# EAGLE board IR_BLASTER_MINI (EAGLE 9.6.2)
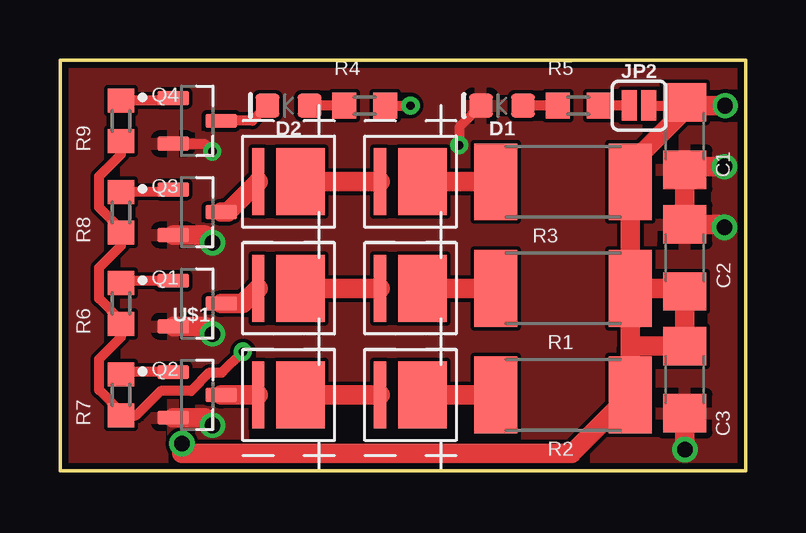
[diagram p0: board, top side]
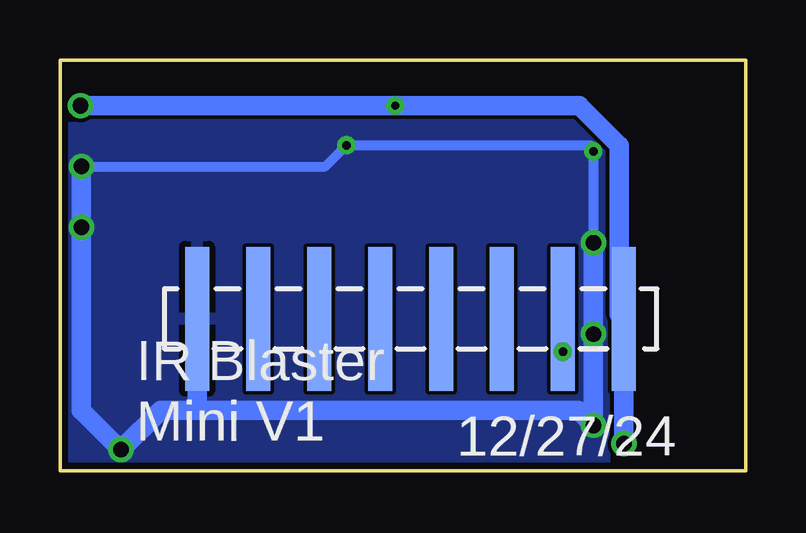
[diagram p1: board, bottom side, seen from below]

Size 28.57 x 17.14 mm. Coordinates in mm from the lower left corner, seen from the top.
Outline: 0,17.14 0,0 28.57,0 28.57,17.14 0,17.14
Copper layers (1*16): Top 0.035mm / dielectric 1.5mm / Bottom 0.035mm
Design rules "default *": minimum track width 6mil, minimum drill 0.35mm, track to track 6mil, track to pad 6mil, pad to pad 6mil, via to via 6mil, smd to smd 6mil, copper to edge 10mil, drill to drill 6mil, minimum pad ring 10mil, minimum via ring 8mil, stop-mask expansion 4mil, vias tented up to drill 0mil, thermal gap 10mil

## Footprints (pad centres in the part's own frame; a part is rotated, then mirrored left to right if it is on the bottom)
C3216 = smd 1.6 x 1.8: 1 -1.4,0; 2 1.4,0
LED-0603 = smd 1 x 1: A -0.877,0; C 0.877,0
SMT-JUMPER_2_NC_PASTE_SILK = smd 0.635 x 1.27: 1 -0.406,0; 2 0.406,0
SOT95P240X120-3N = smd 1.32 x 0.6: 1 -1,0.95; 2 -1,-0.95; 3 1,0
R2512 = smd 1.8 x 3.2: 1 -2.8,0; 2 2.8,0
R0603 = smd 1 x 1.1: 1 -0.85,0; 2 0.85,0
LEFT-H1-SMD = smd 1 x 6 bottom: 1 0,-0.001; 2 2.54,-0.001; 3 5.08,-0.001; 4 7.62,0.001; 5 10.16,-0.001; 6 12.7,0.001; 7 15.24,-0.001; 8 17.78,0.001
XSSYSE03-EMC3838A-H90 = smd 2.032 x 2.794: P$1 -0.496,0 | smd 0.508 x 2.794: P$2 1.27,0

## Placement (x,y rotation side)
C1  22uF  [C3216]  26.04,13.97 270 top
C2  22uF  [C3216]  26.04,8.89 90 top
C3  22uF  [C3216]  26.04,3.81 270 top
D1  Orange  [LED-0603]  18.41,15.24 180 top
D2  Blue  [LED-0603]  9.53,15.24 180 top
JP2  JUMPER-SMT_2_NC_PASTE_SILK  [SMT-JUMPER_2_NC_PASTE_SILK]  24.13,15.24 0 top
Q1  MMBT2222A  [SOT95P240X120-3N]  5.71,6.99 0 top
Q2  MMBT2222A  [SOT95P240X120-3N]  5.71,3.17 0 top
Q3  MMBT2222A  [SOT95P240X120-3N]  5.71,10.79 0 top
Q4  MMBT2222A  [SOT95P240X120-3N]  5.71,14.61 0 top
R1  5R1  [R2512]  20.95,7.62 0 top
R2  5R1  [R2512]  20.95,3.17 0 top
R3  5R1  [R2512]  20.95,12.06 0 top
R4  2K2  [R0603]  12.7,15.24 0 top
R5  2K2  [R0603]  21.59,15.24 0 top
R6  1K  [R0603]  2.54,6.99 90 top
R7  1K  [R0603]  2.54,3.17 90 top
R8  1K  [R0603]  2.54,10.79 90 top
R9  1K  [R0603]  2.54,14.61 90 top
U$1  LEFT-H1-SMD  [LEFT-H1-SMD]  5.08,6.35 0 top
U$2  XSSYSE03-EMC3838A-H90  [XSSYSE03-EMC3838A-H90]  9.53,7.62 180 top
U$3  XSSYSE03-EMC3838A-H90  [XSSYSE03-EMC3838A-H90]  14.61,7.62 180 top
U$4  XSSYSE03-EMC3838A-H90  [XSSYSE03-EMC3838A-H90]  14.61,3.17 180 top
U$5  XSSYSE03-EMC3838A-H90  [XSSYSE03-EMC3838A-H90]  9.53,3.17 180 top
U$6  XSSYSE03-EMC3838A-H90  [XSSYSE03-EMC3838A-H90]  9.53,12.06 180 top
U$7  XSSYSE03-EMC3838A-H90  [XSSYSE03-EMC3838A-H90]  14.61,12.06 180 top

## Library data of the parts
C1-C3 = rcl; SPICEPREFIX: C
D1 = SparkFun-LED; PROD_ID: DIO-00821
D2 = SparkFun-LED; PROD_ID: DIO-08575
JP2 = SparkFun-Jumpers
Q1-Q4 = MMBT2222A; MANUFACTURER: Diotec; MAXIMUM_PACKAGE_HEIGHT: 1.20mm; PARTREV: 2024-03-11; SNAPEDA_PACKAGE_ID: 124619; STANDARD: IPC 7351B
R1-R9 = rcl; SPICEPREFIX: R
U$1 = Flipper-Zero-GPIO-Headers
U$2-U$7 = XSSY SE03-EMC3838A-H90

## Nets
+5V: C1.1 C2.1 C3.1 JP2.2 R1.2 R2.2 R3.2 R4.2 U$1.1
GND: C1.2 C2.2 C3.2 D1.C Q1.2 Q2.2 Q3.2 Q4.2 U$1.8
N$1: D1.A R5.1
N$2: Q1.1 R6.2
N$3: Q1.3 U$2.P$2
N$4: U$2.P$1 U$3.P$2
N$5: R1.1 U$3.P$1
N$6: R2.1 U$4.P$1
N$7: U$4.P$2 U$5.P$1
N$8: Q2.3 U$5.P$2
N$9: Q2.1 R7.2
N$10: Q3.1 R8.2
N$11: Q3.3 U$6.P$2
N$12: U$6.P$1 U$7.P$2
N$13: R3.1 U$7.P$1
N$14: D2.A R4.1
N$15: D2.C Q4.3
N$16: Q4.1 R9.2
N$17: JP2.1 R5.2
N$19: R6.1 R7.1 R8.1 R9.1 U$1.2

## Tracks (layer width: path | path; a pad name or v marks a point on that pad's centre or on a via)
+5V  (via drill 0.35, 0.65)
  Top 0.406: JP2.2 25.91,15.24 C1.1 | R4.2 v14.61,15.24
  Top 0.813: R1.2 25.91,7.62 C2.1 C3.1 23.89,5.21 23.75,5.08 R2.2 | C1.1 26.04,15.06 23.75,12.78 R3.2 R1.2 | R1.2 R2.2 | R2.2 21.32,0.74 5.08,0.74 v5.08,1.14 | v27.72,15.24 25.91,15.24
  Bottom 0.813: v5.08,1.14 U$1.1 5.26,6.53 5.26,13.57 6.93,15.24 v14.61,15.24 v27.72,15.24
GND  (via drill 0.35, 0.65)
  Top 0.406: D1.C 16.64,14.34 v16.64,13.59 | Q4.2 6.03,13.65 v6.35,13.34
  Top 0.813: Q3.2 6.03,9.85 v6.35,9.53 | Q1.2 6.03,6.04 v6.35,5.71 | Q2.2 6.03,2.23 v6.35,1.91 | C3.2 v26.04,0.89 | v27.69,12.7 26.16,12.7 C1.2 C2.2 27.56,10.29 v27.69,10.16
  Bottom 0.406: v6.35,9.53 v6.35,13.34 6.35,13.46 6.48,13.59 v16.64,13.59 17.53,12.7 v27.69,12.7
  Bottom 0.813: v6.35,9.53 v6.35,5.71 v6.35,1.91 6.99,2.54 22.86,2.54 | v27.69,12.7 v27.69,10.16 27.69,2.54 v26.04,0.89 24.38,2.54 22.86,2.54 | 22.86,2.54 U$1.8
  pour Bottom (isolate 0.152): 0,17.14 28.57,17.14 28.57,0 0,0
  pour Top (isolate 0.152): 0,17.14 28.57,17.14 28.57,0 0,0
N$1
  Top 0.406: R5.1 D1.A
N$2
  Top 0.406: Q1.1 2.64,7.93 R6.2
N$3
  Top 0.813: U$2.P$2 7.62,6.99 Q1.3
N$4
  Top 0.813: U$2.P$1 U$3.P$2
N$5
  Top 0.813: U$3.P$1 R1.1
N$6
  Top 0.813: U$4.P$1 R2.1
N$7
  Top 0.813: U$5.P$1 U$4.P$2
N$8
  Top 0.813: U$5.P$2 Q2.3
N$9
  Top 0.406: Q2.1 2.64,4.12 R7.2
N$10
  Top 0.406: Q3.1 4.62,11.64 R8.2
N$11
  Top 0.813: U$6.P$2 6.99,10.79 Q3.3
N$12
  Top 0.813: U$6.P$1 U$7.P$2
N$13
  Top 0.813: U$7.P$1 R3.1
N$14
  Top 0.406: R4.1 D2.A
N$15
  Top 0.406: D2.C 8.01,14.61 Q4.3
N$16
  Top 0.406: Q4.1 4.62,15.46 R9.2
N$17
  Top 0.406: JP2.1 R5.2
N$19  (via drill 0.35)
  Top 0.406: R9.1 2.54,13.2 1.63,12.29 1.63,11 2.54,10.09 R8.1 2.54,9.39 1.63,8.48 1.63,7.19 2.54,6.28 R6.1 2.54,5.58 1.63,4.67 1.63,3.38 2.54,2.47 R7.1 3.17,2.33 4.19,3.34 5.46,3.34 6.22,4.1 6.75,4.1 v7.62,4.98
  Bottom 0.406: v7.62,4.98 U$1.2

## Text on the board
bPlace: 12/27/24 | IR Blaster / Mini V1